# EAGLE board PCB_v21 (EAGLE 9.7.0)
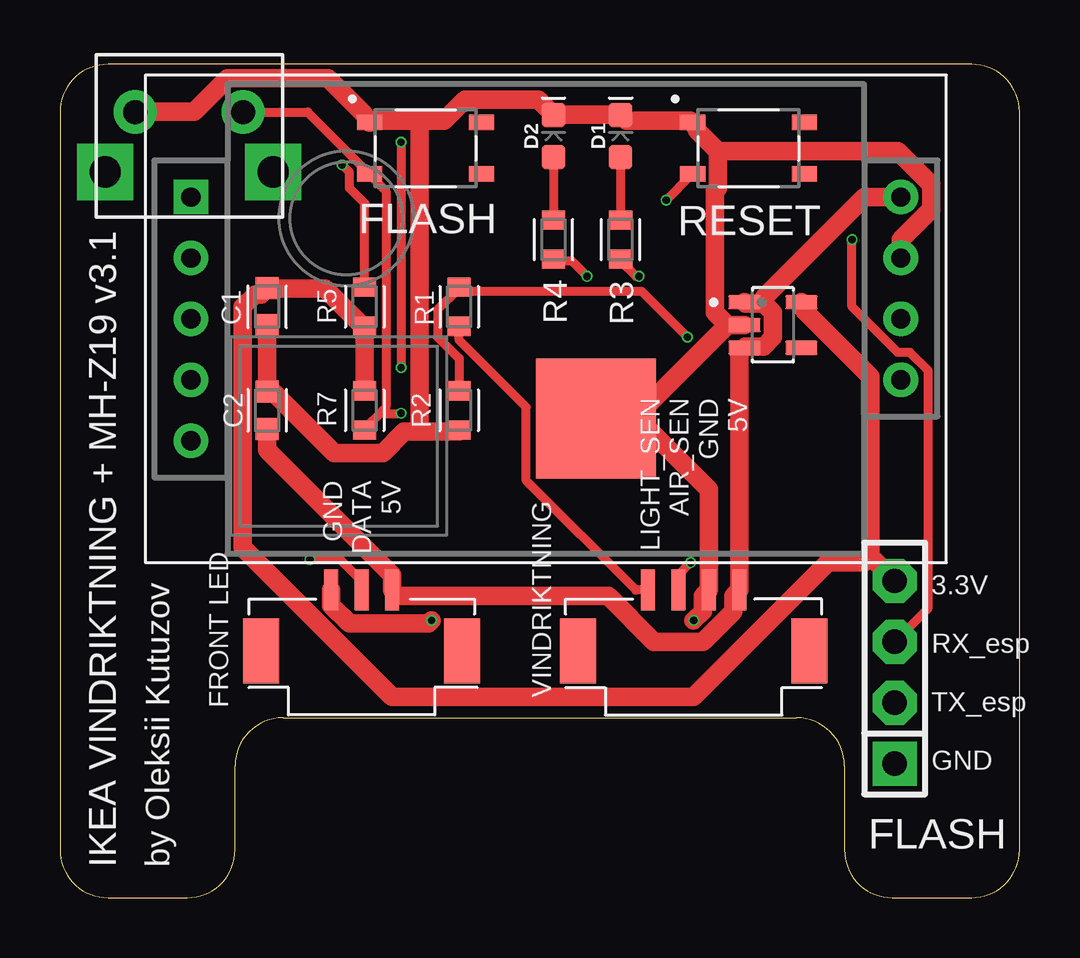
[diagram p0: board, top side]
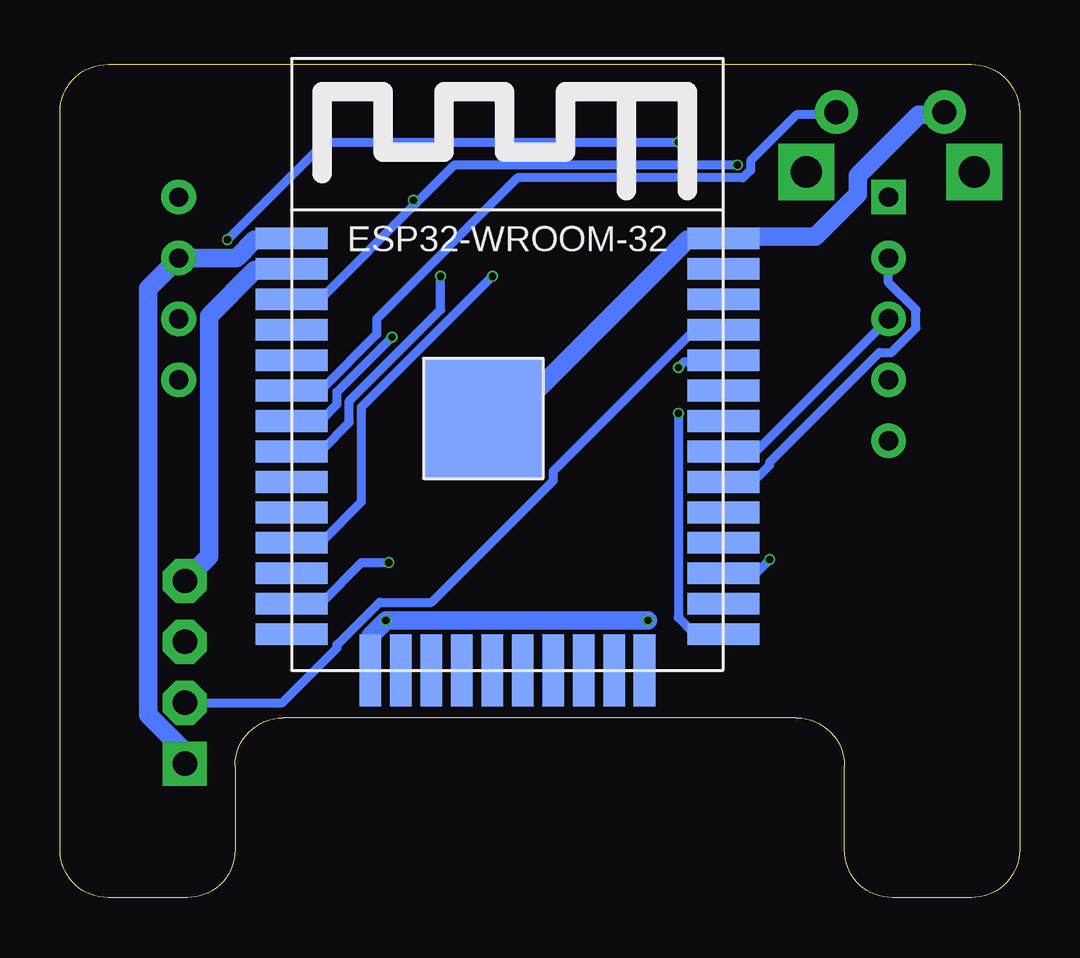
[diagram p1: board, bottom side, seen from below]

Size 40 x 34.75 mm. Coordinates in mm from the lower left corner, seen from the top.
Outline: 32.7,5.5 32.7,2 arc90 34.7,0 38,0 arc90 40,2 40,32.75 arc90 38,34.75 2,34.75 arc90 0,32.75 0,2 arc90 2,0 5.3,0 arc90 7.3,2 7.3,5.5 arc-90 9.3,7.5 30.7,7.5 arc-90 32.7,5.5
Copper layers (1*16): Top 0.035mm / dielectric 1.6mm / Bottom 0.035mm
Design rules "default *": minimum track width 5mil, minimum drill 0.3mm, track to track 5mil, track to pad 5mil, pad to pad 5mil, via to via 5mil, smd to smd 5mil, copper to edge 0.2mm, drill to drill 6mil, minimum pad ring 10mil, minimum via ring 3mil, stop-mask expansion 4mil, vias tented up to drill 0mil, thermal gap 10mil
Net classes: 0 default: width 0.381 mm; 1 5V: width 0.762 mm; 2 GND: width 0.762 mm

## Footprints (pad centres in the part's own frame; a part is rotated, then mirrored left to right if it is on the bottom)
CAPC1608X85 = smd 0.921 x 0.97: 1 -0.775,0; 2 0.775,0
LED-0603 = smd 1 x 1: A -0.877,0; C 0.877,0
SW_SKRPACE010 = smd 1.05 x 0.65: 1 -2.329,1.075; 2 2.329,1.075; 3 -2.329,-1.075; 4 2.329,-1.075
MH-Z19 = drill 0.8 square: 1 29.591,0 | drill 0.8: 2 29.591,2.54; 3 29.591,5.08; 4 29.591,7.62; 5 29.591,10.16; 6 0,0; 7 0,2.54; 8 0,5.08; 9 0,7.62
SIP-100-04-40 = drill 1.016 pad 1.778 square: 1 -3.81,0 | drill 1.016 pad 1.778 octagon: 2 -1.27,0; 3 1.27,0; 4 3.81,0
RESC1608X60 = smd 0.799 x 0.974: 1 -0.815,0; 2 0.815,0
SOT95P285X140-5N = smd 1.35 x 0.6: 1 -1.185,0.95; 2 -1.185,0; 3 -1.185,-0.95; 4 1.185,-0.95; 5 1.185,0.95
JST-GH-4PIN = smd 0.6 x 1.7: 1 1.905,2.286; 2 0.635,2.286; 3 -0.635,2.286; 4 -1.905,2.286 | smd 1.5 x 2.7: P$1 4.826,-0.254; P$2 -4.826,-0.254
JST-GH-3PIN = smd 0.6 x 1.7: 1 1.27,2.54; 2 0,2.54; 3 -1.27,2.54 | smd 1.5 x 2.7: P$1 4.191,0; P$2 -4.191,0
ESP32-WROOM = smd 3 x 0.9: 3V3 0,16.74; EN 0,15.47; GND1 0,18.01; GND3 18,18.01; IO0 18,1.5; IO4 18,2.77; IO5 18,6.58; IO12 0,1.5; IO14 0,2.77; IO16 18,4.04; IO17 18,5.31; IO18 18,7.85; IO19 18,9.12; IO21 18,11.66; IO22 18,15.47; IO23 18,16.74; IO25 0,6.58; IO26 0,5.31; IO27 0,4.04; IO32 0,9.12; IO33 0,7.85; IO34 0,11.66; IO35 0,10.39; NC 18,10.39; RX 18,12.93; SENSOR_VN 0,12.93; SENSOR_VP 0,14.2; TX 18,14.2 | smd 0.9 x 3: CLK 9.635,0; CMD 8.365,0; GND2 3.285,0; IO2 14.715,0; IO13 4.555,0; IO15 13.445,0; SD0 10.905,0; SD1 12.175,0; SD2 5.825,0; SD3 7.095,0 | smd 5 x 5: GND4 8,10.5 | smd 5 x 5 bottom: GND5 8,10.5
SWITCH-MOMENTARY = drill 1.3 square: GND -3.5,2.5; GND_2 3.5,2.5 | drill 1: P$1 -2.25,0; P$2 2.25,0

## Placement (x,y rotation side)
C1  10uF  [CAPC1608X85]  8.64,24.64 270 top
C2  10uF  [CAPC1608X85]  8.64,20.32 90 top
D1  RED  [LED-0603]  23.37,31.75 90 top
D2  Yellow  [LED-0603]  20.57,31.75 90 top
FLASH  SKRPACE010  [SW_SKRPACE010]  15.24,31.24 0 top
J2  MH-Z19-CO2-NDIR-SENSOR  [MH-Z19]  35.05,29.21 180 top
J3  F-1X04-SIP-100-40  [SIP-100-04-40]  34.8,9.4 90 top
R1  12K  [RESC1608X60]  16.64,24.64 90 top
R2  3K  [RESC1608X60]  16.64,20.32 90 top
R3  100  [RESC1608X60]  23.37,27.43 270 top
R4  100  [RESC1608X60]  20.57,27.43 270 top
R5  4.7k  [RESC1608X60]  12.7,24.64 90 top
R7  4.7k  [RESC1608X60]  12.7,20.32 90 top
RESET  SKRPACE010  [SW_SKRPACE010]  28.7,31.24 0 top
U1  AP2112K-3.3TRG1  [SOT95P285X140-5N]  29.72,23.88 0 top
U$1  JST-GH-4PIN  [JST-GH-4PIN]  26.42,10.54 0 top
U$2  JST-GH-3PIN  [JST-GH-3PIN]  12.57,10.29 0 top
U$3  ESP32-WROOM  [ESP32-WROOM]  30.35,9.48 0 bottom
U$4  MOMENTARY-SWITCH  [SWITCH-MOMENTARY]  5.39,32.76 180 top

## Library data of the parts
C1 C2 = Capacitor; CATEGORY: Capacitor
D1 = SparkFun-LED; PROD_ID: DIO-00819
D2 = SparkFun-LED; PROD_ID: DIO-09003
FLASH RESET = SKRPACE010; MANUFACTURER: ALPS; STANDARD: Maniufacturer Recommendations
J2 = mh-z19
J3 = con-headers-jp
R1-R5 R7 = Resistor; CATEGORY: Resistor; SUB-CATEGORY: Fixed
U1 = AP2112K-3.3TRG1; MANUFACTURER: Diodes Inc.; PARTREV: 2-2
U$1 U$2 = My JST-GH Connectors Library
U$3 = ESP32
U$4 = Tactile Switches

## Nets
+3.3V [5V]: C1.1 J3.4 R5.1 R7.2 U1.5 U$3.3V3
+5V [5V]: C2.1 J2.6 U1.1 U1.3 U$1.1 U$2.1
ADC: R1.2 R2.2 U$3.IO35
ESP_RX: J3.3 U$3.RX
ESP_TX: J3.2 U$3.TX
GND [GND]: C1.2 C2.2 D1.C D2.C FLASH.1 J2.7 J3.1 R2.1 RESET.1 U1.2 U$1.2 U$2.3 U$3.GND1 U$3.GND2 U$3.GND3 U$3.GND4 U$3.GND5 U$4.P$2
GPIO0: FLASH.3 R7.1 U$3.IO0 U$4.P$1
GPIO14: U$1.3 U$3.IO14
GPIO16: U$2.2 U$3.IO16
GPIO18: J2.2 U$3.IO18
GPIO19: J2.3 U$3.IO19
GPIO26: R4.2 U$3.IO26
GPIO32: R3.2 U$3.IO32
LIGHT_SENSOR: R1.1 U$1.4
N$4: D1.A R3.1
N$5: D2.A R4.1
RESET: R5.2 RESET.3 U$3.EN
VO: J2.1

## Tracks (layer width: path | path; a pad name or v marks a point on that pad's centre or on a via)
+3.3V
  Top 0.762: R7.2 R5.1 12.7,23.75 11.05,25.4 C1.1 8.38,25.15 8.13,25.15 7.62,24.64 7.62,14.61 13.84,8.38 26.42,8.38 32,13.97 33.53,13.97 33.78,14.22 | 33.78,14.22 33.78,21.72 30.99,24.51 30.99,24.77 U1.5 | J3.4 33.78,14.22
  Bottom 0.762: J3.4 33.78,14.22 33.78,24.26 31.88,26.16 30.35,26.16 U$3.3V3
+5V
  Top 0.762: C2.1 8.64,18.67 13.84,13.46 U$2.1 14.1,12.57 22.86,12.57 24.77,10.67 26.8,10.67 28.07,11.94 28.07,12.57 U$1.1 28.32,22.73 U1.3 28.57,22.99 29.34,22.99 29.72,23.37 29.72,24.38 29.34,24.77 | 29.34,24.77 28.57,24.77 U1.1 | J2.6 33.53,29.21 29.34,25.02 29.34,24.77
ADC  (via drill 0.3)
  Top 0.381: R2.2 16.64,22.48 15.75,23.37 15.75,24.51 16.64,25.4 R1.2 16.76,25.27 24.26,25.27 v26.16,23.37
  Bottom 0.381: v26.16,23.37 28.45,21.08 28.45,20.57 29.08,19.94 30.23,19.94 U$3.IO35
ESP_RX  (via drill 0.3)
  Top 0.381: v14.22,31.5 v14.22,22.1 | v33.02,27.43 33.02,24.64 34.92,22.73 35.43,22.73 36.2,21.97 36.2,12.06 J3.3
  Bottom 0.381: v14.22,22.1 13.97,22.35 12.45,22.35 U$3.RX | v14.22,31.5 28.96,31.5 v33.02,27.43
ESP_TX
  Bottom 0.381: J3.2 30.73,8.13 28.45,10.41 28.45,10.54 26.67,12.32 24.51,12.32 19.43,17.4 19.43,17.78 13.59,23.62 12.45,23.62 U$3.TX
GND  (via drill 0.3)
  Top 0.762: U$2.3 11.3,12.19 12.06,11.43 15.37,11.43 v15.49,11.56 | 27.81,23.88 U1.2 | 27.81,23.88 24,20.07 22.35,20.07 U$3.GND4 24.26,19.81 27.05,17.02 U$1.2 26.8,12.57 26.8,11.94 v26.42,11.56 | C1.2 C2.2 8.89,21.08 11.43,18.54 13.46,18.54 14.35,19.43 14.99,19.43 | 14.99,19.43 16.64,19.43 R2.1 | 14.99,32.38 16,32.38 16.89,33.27 19.94,33.27 20.32,32.89 D2.C D1.C 23.62,32.38 26.29,32.38 RESET.1 26.54,32 27.43,31.11 | 14.99,32.38 12.95,32.38 FLASH.1 12.7,32.64 11.18,34.16 6.99,34.16 5.59,32.77 3.17,32.77 U$4.P$2 | 14.99,32.38 14.99,19.43 | 27.43,31.11 27.43,29.59 27.3,29.46 27.3,24.38 27.81,23.88 | J2.7 35.05,27.43 36.32,28.7 36.32,29.72 34.92,31.11 27.43,31.11
  Bottom 0.762: U$4.P$2 3.17,32.64 4.19,32.64 6.73,30.1 6.73,29.34 8.51,27.56 12.32,27.56 U$3.GND3 12.7,27.43 13.84,27.43 21.21,20.07 22.23,20.07 U$3.GND4 | U$3.GND1 30.35,27.43 31.88,27.43 32.64,26.67 J2.7 36.32,25.4 36.32,7.62 34.8,6.1 J3.1 | v15.49,11.56 v26.42,11.56 27.05,10.92 27.05,9.53 U$3.GND2
GPIO0  (via drill 0.3)
  Top 0.381: 13.46,20.32 13.59,20.45 13.59,29.46 12.95,30.1 FLASH.3 10.32,32.76 U$4.P$1 | 13.46,20.32 12.7,19.56 R7.1 | v14.22,20.19 13.59,20.19 13.46,20.32
  Bottom 0.381: v14.22,20.19 14.22,11.68 13.59,11.05 12.45,11.05 U$3.IO0 | 30.23,21.21 29.08,21.21 26.8,23.5 26.8,24.13 20.92,30.01 11.53,30.01 11.21,30.33 11.21,30.72 9.29,32.64 7.75,32.64 U$4.P$1
GPIO14  (via drill 0.3)
  Top 0.381: U$1.3 25.78,13.46 v26.29,13.97
  Bottom 0.381: v26.29,13.97 27.43,13.97 29.08,12.32 30.23,12.32 U$3.IO14
GPIO16  (via drill 0.3)
  Top 0.381: U$2.2 12.57,13.21 11.68,14.1 v10.41,14.1
  Bottom 0.381: v10.41,14.1 10.92,13.59 12.32,13.59 U$3.IO16
GPIO18
  Bottom 0.381: J2.2 5.46,25.65 4.32,24.51 4.32,23.75 5.33,22.73 5.84,22.73 10.41,18.16 10.41,18.03 11.05,17.4 12.32,17.4 U$3.IO18
GPIO19
  Bottom 0.381: J2.3 10.92,18.67 12.32,18.67 U$3.IO19
GPIO26  (via drill 0.3)
  Top 0.381: v21.97,25.91 21.34,26.54 20.57,26.54 R4.2
  Bottom 0.381: v21.97,25.91 27.43,20.45 27.43,16.51 29.08,14.86 30.23,14.86 U$3.IO26
GPIO32  (via drill 0.3)
  Top 0.381: v24.13,25.91 24,25.91 23.37,26.54 R3.2
  Bottom 0.381: v24.13,25.91 24.13,24.51 27.94,20.7 27.94,19.81 29.08,18.67 30.23,18.67 U$3.IO32
LIGHT_SENSOR
  Top 0.381: R1.1 16.64,23.24 19.43,20.45 19.43,17.4 24,12.83 U$1.4
N$4
  Top 0.381: D1.A R3.1
N$5
  Top 0.381: D2.A R4.1
RESET  (via drill 0.3)
  Top 0.381: R5.2 12.7,28.96 12.06,29.59 12.06,30.24 v11.76,30.55 | v25.27,29.08 26.29,30.1 RESET.3
  Bottom 0.381: 25.15,28.96 29.08,25.02 30.23,25.02 U$3.EN | v25.27,29.08 25.15,28.96 | 25.15,28.96 23.55,30.55 v11.76,30.55

## Text on the board
tNames: FLASH | FLASH | S1 | LIGHT_SEN / AIR_SEN / GND / 5V | GND / DATA / 5V | VINDRIKTNING | FRONT LED | 3.3V / / RX_esp / / TX_esp / / GND | FLASH | IKEA VINDRIKTNING + MH-Z19 v3.1 | by Oleksii Kutuzov